# Altium PCB AB1000_FB_V6.1.PcbDoc
Units mm, origin at the board's own origin, x right, y up, seen from the top; angles counter-clockwise.
Board outline 57.5 x 27.6 mm, 2 copper layers (Top Layer, Bottom Layer), stack 1.581 mm thick; 70 components, 68 nets, 304 pads, 85 vias.
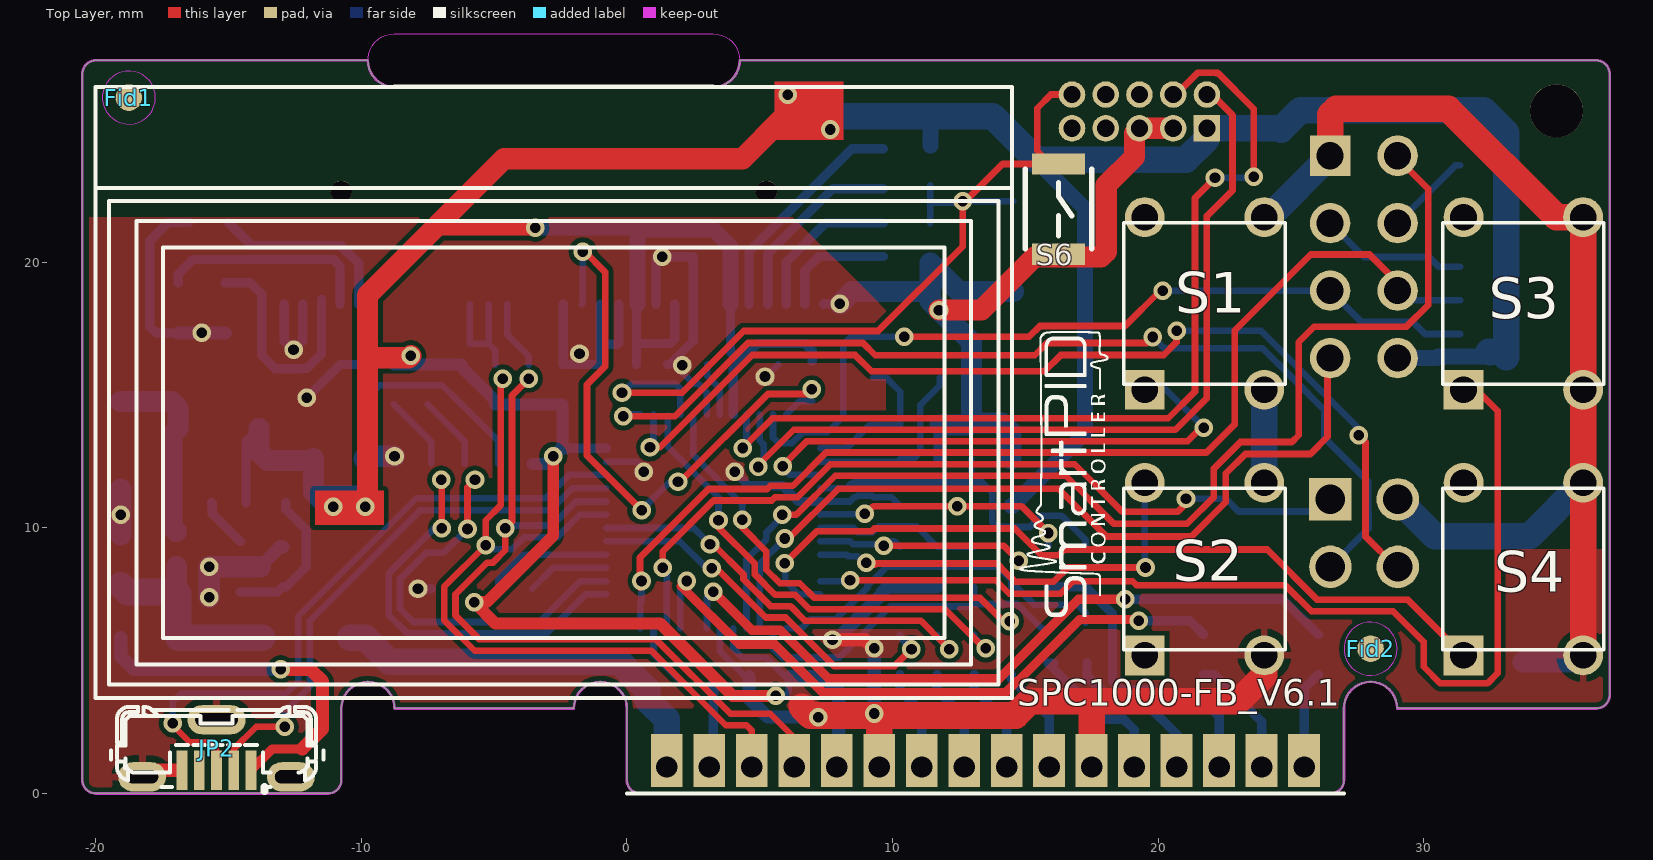
[diagram p0: Top Layer view]
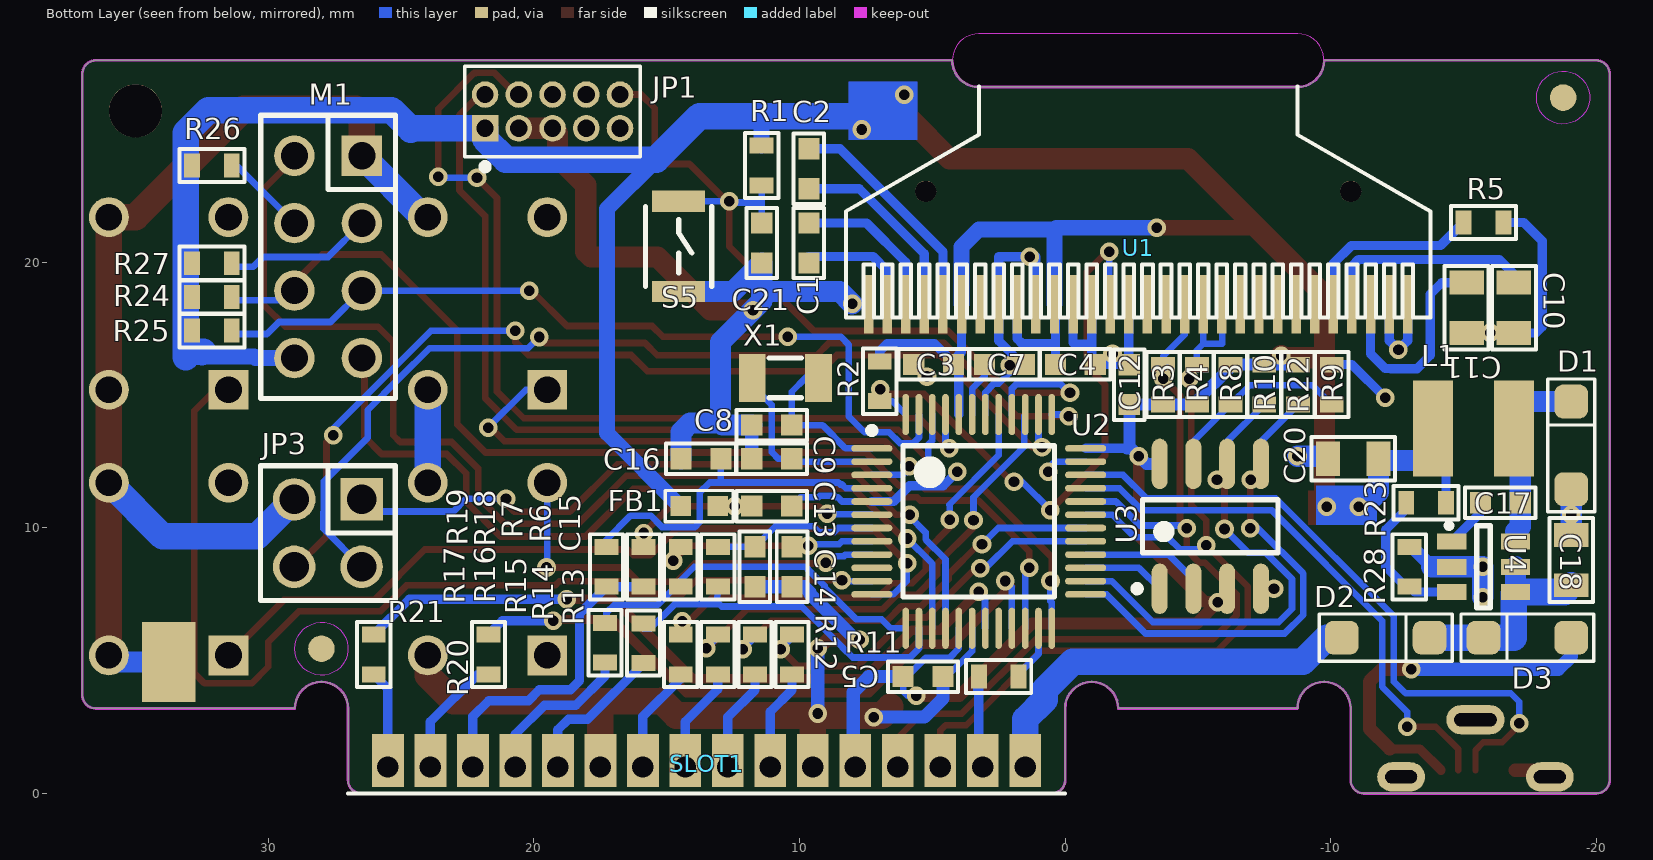
[diagram p1: Bottom Layer view, seen from below]
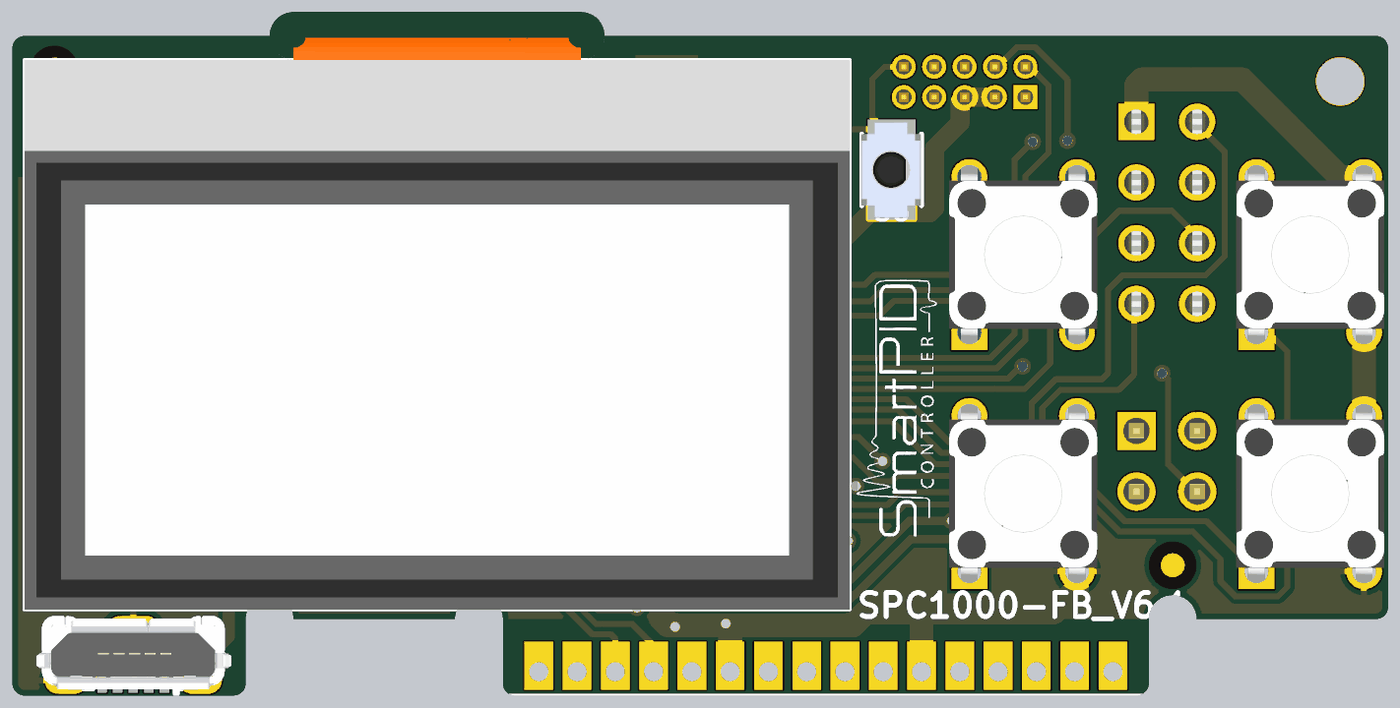
[diagram p2: 3D render of the assembled board from above, using the file's embedded part models]
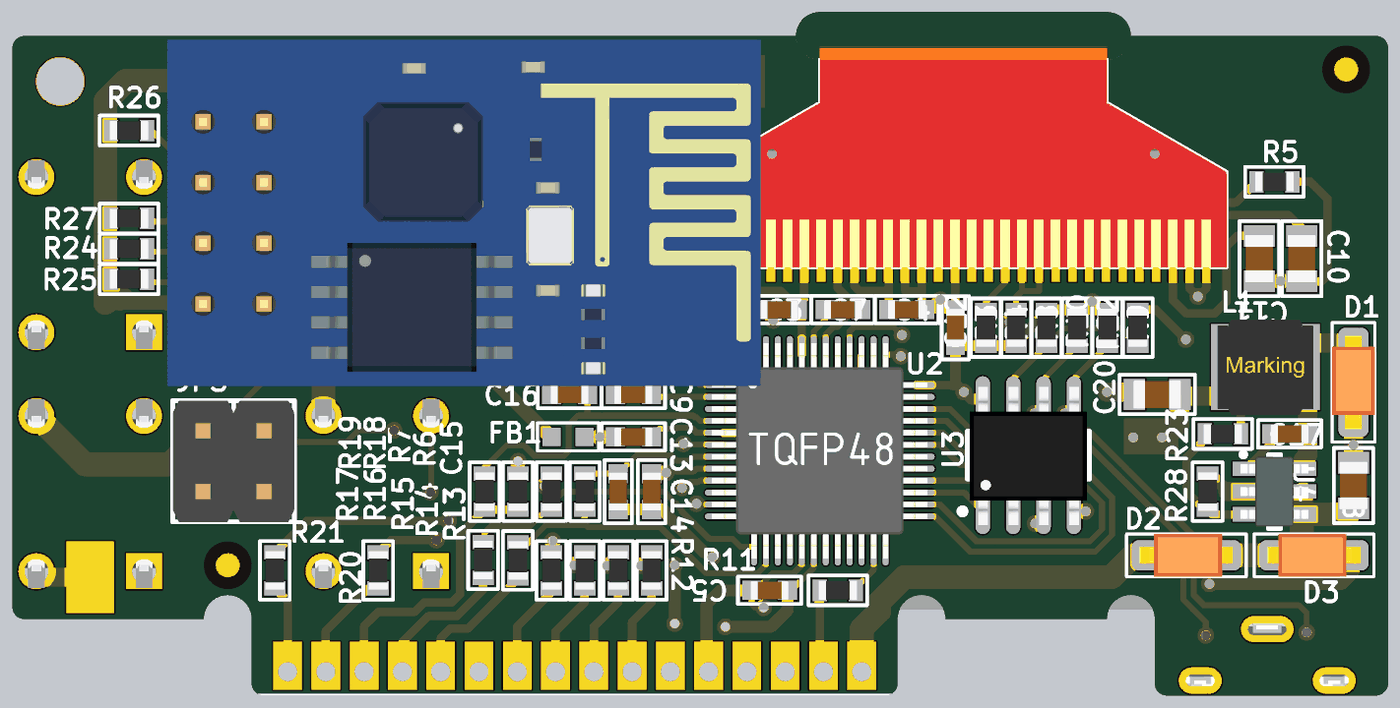
[diagram p3: 3D render of the assembled board from below, using the file's embedded part models]

## Layer stack, top to bottom
Top Solder: solder mask 0.0102, Solder Resist, Dk 3.5
Top Layer: signal copper 0.0356
Dielectric 1: dielectric 1.51, FR-4, Dk 4.8
Bottom Layer: signal copper 0.0356
Bottom Solder: solder mask 0.0102, Solder Resist, Dk 3.5

## Board outline
-20,0.005 -11.25,0.005 ccw(c-11.25,0.505) -10.75,0.505 -10.75,3.205 cw(c-9.75,3.205) -9.75,4.205 cw(c-9.75,3.205) -8.75,3.205 -2,3.205 cw(c-1,3.205) -1,4.205 cw(c-1,3.205) 0,3.205 0,0.505 ccw(c0.5,0.505) 0.5,0.005 26.5,0.005 ccw(c26.5,0.505) 27,0.505 27,3.205 cw(c28,3.205) 28,4.205 cw(c28,3.205) 29,3.205 36.5,3.205 ccw(c36.5,3.705) 37,3.705 37,27.105 ccw(c36.5,27.105) 36.5,27.605 4.25,27.605 cw(c3.25,27.605) 3.25,26.605 -8.75,26.605 cw(c-8.75,27.605) -9.75,27.605 -20,27.605 ccw(c-20,27.105) -20.5,27.105 -20.5,0.505 ccw(c-20,0.505)
cut-out: -8.75,26.609 cw(c-8.75,27.61) -8.75,28.61 3.25,28.61 cw(c3.25,27.61) 4.25,27.61 cw(c3.25,27.61) 3.25,26.609

## Design rules (kind name [scope] priority, off if disabled: settings)
Clearance Clearance_KO [(OnLayer('Keep-Out Layer')) vs InComponent('SLOT1','JP2')] p1: gap=0
Clearance [All] p2: gap=0.18
ComponentClearance ComponentClearance_fiduc [All vs InComponent('Fid1')] p1: gap=-1 collisioncheckmode=3 verticalgap=-1 showdistances=TRUE
ComponentClearance [All] p2: gap=0.254 collisioncheckmode=3 verticalgap=0.254 showdistances=FALSE
HoleToHoleClearance [All] p1: gap=0.18 allowstackedmicrovias=TRUE
MinimumSolderMaskSliver [All] p1: minsoldermaskwidth=0.1
PolygonConnect PolygonConnect_via [All vs IsVia] p1: connectstyle=Direct reliefconductorwidth=0.254 reliefentries=4 polygonreliefangle="90 Angle" airgapwidth=0.254
PolygonConnect [All] p2: connectstyle=Relief reliefconductorwidth=0.254 reliefentries=4 polygonreliefangle="90 Angle" airgapwidth=0.254
RoutingVias [All] p1: holewidth=0.5 width=0.8 viastyle="Through Hole" minholewidth=0.4 minwidth=0.7 maxholewidth=1 maxwidth=2
SolderMaskExpansion [All] p1: expansion=0.07
Width [All] p1: maxlimit=3 minlimit=0.18 preferedwidth=0.35
27 further rules are at their usual default settings.

## Components (designator, comment, footprint, x,y, rotation, side; value= is the part's Value field where it differs from the comment)
C1 "1uF" C0603_IR 9.647,20.731 r270 bottom
C2 "1uF" C0603_IR 9.647,23.525 r270 bottom
C3 "1uF" C0603_IR 4.948,16.159 r180 bottom
C4 "1uF" C0603_IR -0.386,16.159 r0 bottom
C5 "0.1uF" C0603_IR 5.35,4.405 r0 bottom
C7 "0.1uF" C0603_IR 2.281,16.159 r0 bottom
C8 "15pF" C0603_IR 11.044,13.873 r0 bottom
C9 "15pF" C0603_IR 11.044,12.603 r0 bottom
C10 "2.2uF 16V" C0805_IR -16.896,18.288 r90 bottom
C11 "10uF/16V" C0805_IR -15.118,18.288 r90 bottom
C12 "0.1uF" C0603_IR -2.418,15.397 r90 bottom
C13 "0.1uF" C0603_IR 11.044,10.825 r180 bottom
C14 "0.1uF" C0603_IR 10.282,8.539 r270 bottom
C15 "0.1uF" C0603_IR 11.679,8.539 r270 bottom
C16 "0.1uF" C0603_IR 13.711,12.603 r0 bottom
C17 "10nF" C0603_IR -16.388,10.952 r0 bottom
C18 "10uF" C0805_IR -19.055,8.793 r270 bottom
C20 "10uF" C0805_IR -10.85,12.605 r180 bottom
C21 "0.1uF" C0603_IR 11.425,20.731 r90 bottom
D1 "B5819W" SOD123 -19.055,13.111 r90 bottom
D2 "B5819W" SOD123 -12.07,5.872 r180 bottom
D3 "B5819W" SOD123 -17.404,5.872 r0 bottom
FB1 "1KZ" 0603FB-1KZ 13.076,10.825 r0 bottom
Fid1 "Fiducial mark" Fiducial -18.75,26.205 r90 top
Fid2 "Fiducial mark" Fiducial 28,5.455 r90 top
JP1 "Pin Header & Jumper 1.27 mm (62201021121)" 62201021121_m 19.299,25.684 r180 bottom
JP2 "USB Connector Vert" USB_1051330001_slt -15.45,1.705 r180 top
JP3 "WE-2.54 mm Pin Header & Jumper 61300421121" 61300421121 27.756,9.809 r0 bottom
L1 "4.7 µH" "WE-LQS 4012" -15.372,13.746 r0 bottom
M1 "ESP8266-01" ESP8266-01 27.75,20.205 r270 bottom
R1 "10K" R0603_IR 11.425,23.652 r270 bottom
R2 "10K" R0603_IR 6.98,15.524 r270 bottom
R3 "10K" R0603_IR -3.688,15.397 r90 bottom
R4 "10K" R0603_IR -4.958,15.397 r90 bottom
R5 "390K" R0603_IR -15.75,21.505 r180 bottom
R6 "20K" R0603_IR 13.076,8.539 r90 bottom
R7 "20K" R0603_IR 14.473,8.539 r90 bottom
R8 "10K" R0603_IR -6.228,15.397 r90 bottom
R9 "DNP" R0603_IR -10.038,15.397 r270 bottom
R10 "10K" R0603_IR -7.498,15.397 r90 bottom
R11 "1K" R0603_IR 2.5,4.405 r180 bottom
R12 "1K" R0603_IR 10.282,5.237 r90 bottom
R13 "1K" R0603_IR 11.679,5.237 r90 bottom
R14 "1K" R0603_IR 13.076,5.237 r90 bottom
R15 "1K" R0603_IR 14.473,5.237 r90 bottom
R16 "100" R0603_IR 15.87,5.662 r90 bottom
R17 "100" R0603_IR 17.325,5.68 r90 bottom
R18 "10" R0603_IR 15.87,8.539 r90 bottom
R19 "1K" R0603_IR 17.267,8.539 r90 bottom
R20 "1K" R0603_IR 21.712,5.237 r90 bottom
R21 "1K" R0603_IR 26.03,5.237 r90 bottom
R22 "10K" R0603_IR -8.768,15.397 r90 bottom
R23 "49.9k 0.5%" R0603_IR -13.594,10.952 r0 bottom
R24 "10K" R0603_IR 32.126,18.699 r180 bottom
R25 "10K" R0603_IR 32.126,17.429 r180 bottom
R26 "10K" R0603_IR 32.126,23.652 r180 bottom
R27 "10K" R0603_IR 32.126,19.969 r180 bottom
R28 "16k 0.5%" R0603_IR -12.959,8.539 r270 bottom
S1 "430156043726" 4301x60437x6_m 21.75,18.455 r0 top
S2 "430156043726" 4301x60437x6_m 21.75,8.455 r0 top
S3 "430156043726" 4301x60437x6_m 33.75,18.455 r0 top
S4 "430156043726" 4301x60437x6_m 33.75,8.455 r0 top
S5 "B3U-1000P" SW_Tactile_SMD_4x2.5 14.55,20.605 r270 bottom
S6 "B3U-1000P" SW_Tactile_SMD_4x2.5 16.25,22.005 r270 top
SLOT1 "slot_front_panel_main_v3" FRONT_PANEL_MAIN_SLOT_V2.2_NCO 13.5,1 r180 bottom
U1 "OLED 1.3 128x64" OLED_1.3_128x64 -2.75,13.205 r180 top locked
U2 "ATSAMD21G-A" STM-LQFP48_L 3.253,10.249 r180 bottom
U3 "SPI EEPROM" 8S1_L -5.466,10.063 r90 bottom
U4 "AP3211(AOZ1280)" SOT-23-6 -15.753,8.539 r0 bottom
X1 "32.768kHz" FC-135 10.536,15.651 r180 bottom

## Footprints (in the part's own frame and the unit in brackets; to place one, negate y for a bottom-side part, rotate by r counter-clockwise, add the part's x,y. Pads: shape width x height; smd on the part's side, far side on the other; paste and mask are expansions set on the pad)
8S1_L [mm] "SOIC, 8-Leads, Body 4.9x3.9mm, Pitch 1.27mm, IPC High Density"
  oval 1.9x0.6 smd: 1(-2.35,1.905) 2(-2.35,0.635) 3(-2.35,-0.635) 4(-2.35,-1.905) 5(2.35,-1.905) 6(2.35,-0.635) 7(2.35,0.635) 8(2.35,1.905)
  silkscreen extent -2.47,-2.55 1,2.88, body extent -2.92,-2.45 2.86,2.45, height 1.45
0603FB-1KZ [mil] "FERRITE BEAD 0603"
  rect 30x30 smd: 1(0,0) 2(55,0)
  silkscreen extent -23,-23 78,23, body extent -4,-15 59,15, height 20
4301x60437x6_m [mm] "6*6mm vertical type, THT, height 4.3mm, salmon actuator 360gf, Bulk"
  rect 1.5x1.5 hole 1: 1(-2.25,-3.25)
  round 1.5 hole 1: 1(-2.25,3.25) 2(2.25,-3.25) 2(2.25,3.25)
  silkscreen extent -3.04,-3.04 3.04,3.04, body extent -3.1,-3.95 3.1,3.95, height 4.31
61300421121 [mm] "4 pins, dual pin, straight, gold plating"
  rect 1.6x1.6 hole 1.1: 1(-1.27,-1.27)
  round 1.6 hole 1.1: 2(1.27,-1.27) 3(1.27,1.27) 4(-1.27,1.27)
  silkscreen extent -2.54,-2.54 2.54,2.54, body extent -2.54,-2.54 2.54,2.54, height 8.55
62201021121_m [mm] "10 pins, dual row, straight, gold plating"
  rect 1x1 hole 0.65: 1(-2.54,-0.635)
  round 1 hole 0.65: 2(-2.54,0.635) 3(-1.27,-0.635) 4(-1.27,0.635) 5(0,-0.635) 6(0,0.635) 7(1.27,-0.635) 8(1.27,0.635) 9(2.54,-0.635) 10(2.54,0.635)
  silkscreen extent -3.3,-2.21 3.3,1.7, body extent -3.17,-1.7 3.18,1.7, height 5.31
C0603_IR [mm]
  rect 0.8x0.8 smd: 1(0.75,0) 2(-0.75,0)
  silkscreen extent -1.33,-0.58 1.33,0.58, body extent -0.8,-0.4 0.8,0.4, height 0.8
C0805_IR [mm]
  rect 0.9x1.3 smd: 1(0.95,0) 2(-0.95,0)
  silkscreen extent -1.58,-0.82 1.58,0.82, body extent -1,-0.6 1,0.6, height 0.95
ESP8266-01 [mm] "8 pins, dual row, straight, gold plating"
  rect 1.52x1.52 hole 1.02: 1(-3.81,1.27)
  round 1.52 hole 1.02: 2(-3.81,-1.27) 3(-1.27,1.27) 4(-1.27,-1.27) 5(1.27,1.27) 6(1.27,-1.27) 7(3.81,1.27) 8(3.81,-1.27)
  silkscreen extent -5.33,-2.54 5.33,2.54, body extent -7.25,-2.78 7.25,22.02, height 14.38
FC-135 [mm]
  rect 1x1.8 smd: 1(-1.25,0) 2(1.25,0)
  silkscreen extent -0.6,-0.75 0.6,0.75, body extent -1.6,-0.75 1.6,0.75, height 0.81
Fiducial [mm]
  round 1 smd far side paste-10 mask+0.5: 0(0,0)
  round 1 smd paste-10 mask+0.5: 0(0,0)
  Keep-Out Layer circle w0.01: c0,0 r1
FRONT_PANEL_MAIN_SLOT_V2.2_NCO [mm]
  rect 1.2x1.2 hole 0.8 paste-3: 1(-12,0) 2(-10.4,0) 3(-8.8,0) 4(-7.2,0) 5(-5.6,0) 6(-4,0) 7(-2.4,0) 8(-0.8,0) 9(0.8,0) 10(2.4,0) 11(4,0) 12(5.6,0) 13(7.2,0) 14(8.8,0) 15(10.4,0) 16(12,0)
  rect 1.2x2 smd paste-3: 1(-12,0.25) 2(-10.4,0.25) 3(-8.8,0.25) 4(-7.2,0.25) 5(-5.6,0.25) 6(-4,0.25) 7(-2.4,0.25) 8(-0.8,0.25) 9(0.8,0.25) 10(2.4,0.25) 11(4,0.25) 12(5.6,0.25) 13(7.2,0.25) 14(8.8,0.25) 15(10.4,0.25) 16(12,0.25)
  rect 1.2x2 smd far side paste-3: 1(-12,0.25) 2(-10.4,0.25) 3(-8.8,0.25) 4(-7.2,0.25) 5(-5.6,0.25) 6(-4,0.25) 7(-2.4,0.25) 8(-0.8,0.25) 9(0.8,0.25) 10(2.4,0.25) 11(4,0.25) 12(5.6,0.25) 13(7.2,0.25) 14(8.8,0.25) 15(10.4,0.25) 16(12,0.25)
  silkscreen extent -13.5,-1 13.5,-1, body extent -12.6,-0.75 12.6,1.25, height 0.02
OLED_1.3_128x64 [mm]
  rect 0.356x2.2 smd far side paste-0.5: 1(-10.15,-5.219) 2(-9.45,-5.219) 3(-8.75,-5.219) 4(-8.05,-5.219) 5(-7.35,-5.219) 6(-6.65,-5.219) 7(-5.95,-5.219) 8(-5.25,-5.219) 9(-4.55,-5.219) 10(-3.85,-5.219) 11(-3.15,-5.219) 12(-2.45,-5.219) 13(-1.75,-5.219) 14(-1.05,-5.219) 15(-0.35,-5.219) 16(0.35,-5.219) 17(1.05,-5.219) 18(1.75,-5.219) 19(2.45,-5.219) 20(3.15,-5.219) 21(3.85,-5.219) 22(4.55,-5.219) 23(5.25,-5.219) 24(5.95,-5.219) 25(6.65,-5.219) 26(7.35,-5.219) 27(8.05,-5.219) 28(8.75,-5.219) 29(9.45,-5.219) 30(10.15,-5.219)
  round 0.8 hole 0.8: CT(-8,-9.469) CT(8,-9.469)
  silkscreen extent -17.25,-13.41 17.25,9.6, body extent -17.25,-14.5 17.25,9.6, height 1.45
R0603_IR [mm]
  rect 0.6x0.9 smd: 1(0.75,0) 2(-0.75,0)
  silkscreen extent -1.22,-0.63 1.22,0.63, body extent -0.8,-0.4 0.8,0.4, height 0.4
SOD123 [mil]
  rrect50% 50x50 smd: A(-65,0) C(65,0)
  silkscreen extent -98,-35 98,35, body extent -77,-35 77,35, height 47
SOT-23-6 [mm] "SOT-23, 6-Leads, Body 2.90x1.60mm, Pitch 0.95mm, IPC Medium Density"
  rect 1.1x0.6 smd: 1(1.2,-0.95) 2(1.2,0) 3(1.2,0.95) 4(-1.2,0.95) 5(-1.2,0) 6(-1.2,-0.95)
  silkscreen extent -0.25,-1.65 1.4,1.55, body extent -1.42,-1.46 1.42,1.46, height 1.1
STM-LQFP48_L [mm] "QFP, 48-Leads, Body 7x7mm, Pitch 0.5mm, IPC High Density"
  oval 1.55x0.25 smd: 1(-4.025,2.75) 2(-4.025,2.25) 3(-4.025,1.75) 4(-4.025,1.25) 5(-4.025,0.75) 6(-4.025,0.25) 7(-4.025,-0.25) 8(-4.025,-0.75) 9(-4.025,-1.25) 10(-4.025,-1.75) 11(-4.025,-2.25) 12(-4.025,-2.75) 25(4.025,-2.75) 26(4.025,-2.25) 27(4.025,-1.75) 28(4.025,-1.25) 29(4.025,-0.75) 30(4.025,-0.25) 31(4.025,0.25) 32(4.025,0.75) 33(4.025,1.25) 34(4.025,1.75) 35(4.025,2.25) 36(4.025,2.75)
  oval 0.25x1.55 smd: 13(-2.75,-4.025) 14(-2.25,-4.025) 15(-1.75,-4.025) 16(-1.25,-4.025) 17(-0.75,-4.025) 18(-0.25,-4.025) 19(0.25,-4.025) 20(0.75,-4.025) 21(1.25,-4.025) 22(1.75,-4.025) 23(2.25,-4.025) 24(2.75,-4.025) 37(2.75,4.025) 38(2.25,4.025) 39(1.75,4.025) 40(1.25,4.025) 41(0.75,4.025) 42(0.25,4.025) 43(-0.25,4.025) 44(-0.75,4.025) 45(-1.25,4.025) 46(-1.75,4.025) 47(-2.25,4.025) 48(-2.75,4.025)
  silkscreen extent -4.15,-2.85 2.85,3.55, body extent -4.51,-4.51 4.51,4.51, height 1.1
SW_Tactile_SMD_4x2.5 [mm] "B3U-1000P"
  rect 0.8x2 smd: 1(-1.7,0) 2(1.7,0)
  silkscreen extent -1.5,-1.25 1.5,1.25, body extent -2,-1.27 2,1.23, height 1.6
USB_1051330001_slt [mm]
  rect 0.4x1.5 smd: 1(-1.3,0.825) 2(-0.65,0.825) 3(0,0.825) 4(0.65,0.825) 5(1.3,0.825)
  oval 1.8x1.1 hole 0.5 slot 1.2 at 0 deg: M1(-2.8,1.075) M2(2.8,1.075)
  oval 2.2x1.1 hole 0.5 slot 1.6 at 0 deg: M3(0,-1.075)
  silkscreen extent -4.03,-1.56 3.98,1.6, body extent -4.02,-1.56 3.98,1.46, height 6.61
"WE-LQS 4012" [mm] "SMD Power Inductor, 2-Leads, Body 4.0x4.0mm"
  rect 1.5x3.6 smd: 1(-1.525,0) 2(1.525,0)
  body extent -2,-2 2,2, height 1.17

## Part data
C1 C2 C3 C4 C5 C7 C8 C9 C10 C11 C12 C13 C14 C15 C16 C21: library part C_SMD, "Capacitor"
C17 C18 C20: library part CapSMD, "Capacitor"
D1 D2 D3: library part "Diode SCHOTTKY", "DIODE SCHOTTKY"
FB1: library part 0603FB-1KZ, "FERRITE BEAD 1000 OHM 400mA"
Fid1 Fid2: library part Fiducial, "Fiducial Mark"
JP1: "WR-PHD 1.27 mm Dual Pin Header"
JP2: "Micro USB SMT Type B"
JP3: "WR-PHD 2.54 mm Dual Pin Header"
L1: library part "WE-LQS 4012, 74404041010", "WE-LQS SMD Power Inductor, L=1.0 µH"
R1 R2 R3 R4 R5 R6 R7 R8 R9 R10 R11 R12 R13 R14 R15 R16 R17 R18 R19 R20 R21 R22: library part R_SMD, "Resistor"
R23 R24 R25 R26 R27 R28: library part ResSMD, "Resistor"
S1 S2 S3 S4 S5 S6: library part "WS-TATV, 430156043726m", "WS-TATV 6x6 mm THT"
SLOT1: library part slot_front_panel_main_v2_1
U1: library part DISP_OLED_1.3_128x64, "UG-2864HSWEG01 OLED display / <p>Both 1.3\" and 0.96\" models share the same FPC tab footprint, only the screen dimensions vary.</p>"
U2: "Atmel SAMD21G SMART ARM-Based Microcontroller"
U3: library part "25x SPI EEPROM", "8Kbit (1024 x 8), SPI Bus Serial Automotive EEPROM, supports Mode 0 and 3 operation, 2.7V, 8-Pin SOIC"
U4: library part LT1933ES6, "600 mA, 500 kHz Step-Down Switching Regulator, 6-pin SOT23 (S6-6), -40 to 85 degC"
X1: library part XTAL_FC-135, "EPSON TOYOCOM - FC-135 32.768KHZ ±20PPM,9.0PF - CRYSTAL, SM, WATCH"

## Free pads (board coordinates)
  rect 2x3 smd far side paste-3: SM(33.75,4.955)
  round 2 hole 2: T(35,25.705)

## Via types
v1: diameter 0.7, hole 0.4, Top Layer to Bottom Layer, tented both sides, 85 vias

## Nets (pads, with @x,y where several pads share a name; then routed paths per layer and width w, separated by ;. In a path a pad name is that pad's centre, name@x,y a point inside that pad or via, vN(x,y) a via of type N, cw(c..) or ccw(c..) an arc to the next point about the centre after c; other vN are vias at no path point)
12V: D2.A SLOT1.16 | length 15
  Bottom Layer w1: D2.A -9.854,5.872 -8.94,4.958 -0.284,4.958 0.77,3.903 0.77,3.53 1.5,2.8 SLOT1.16@1.5,1.25
A33V: C13.2 FB1.1 R18.1 U2.6 | length 9.7
  Top Layer w0.25: v1@8.979,10.513 9.291,10.825 14.854,10.825 v1(15.87,9.809)
  Bottom Layer w0.25: U2.6 7.278,10.513 v1@8.979,10.513 ; R18.1 v1(15.87,9.809)
  other v1: 8.954,10.538 12.441,10.825
ADD1: U2.20
BTN1: S1.1 U2.3 | length 21.4
  Top Layer w0.25: v1(5.862,12.324) 5.862,12.121 6.064,12.324 6.064,12.551 6.783,13.27 21.115,13.27 21.625,13.78 v1(21.725,13.78)
  Bottom Layer w0.25: v1(5.862,12.324) 5.862,12.16 5.873,12.171 5.952,12.092 6.036,12.092 6.13,11.999 U2.3 ; S1.1@19.5,15.205 20.3,15.205 v1(21.725,13.78)
BTN2: S2.1 U2.9 | length 16.4
  Top Layer w0.25: v1(9.012,8.691) 8.947,8.626 9.34,8.626 9.378,8.664 13.941,8.664 14.097,8.508 14.097,8.496 14.613,7.98 16.073,7.98 16.607,8.514 v1(19.528,8.514)
  Bottom Layer w0.25: U2.9 8.266,8.999 8.327,8.938 8.689,8.938 8.936,8.691 v1(9.012,8.691) ; S2.1@19.5,11.705 19.5,8.567 19.447,8.514 v1(19.528,8.514)
BTN3: S3.1 U2.11 | length 39.7
  Top Layer w0.25: v1(8.402,8.031) 13.889,8.031 14.397,7.523 16.327,7.523 16.799,7.995 19.045,7.995 19.201,7.839 24.8,7.839 25.776,6.863 28.842,6.863 30,5.705 30,4.774 30.624,4.15 32.4,4.15 32.786,4.536 32.786,14.406 31.988,15.205 S3.1@31.5,15.205
  Bottom Layer w0.25: U2.11 v1@8.402,7.999
BTN4: S4.1 U2.12 | length 30.5
  Top Layer w0.25: v1(5.939,8.666) 7.156,9.883 9.225,9.883 9.323,9.981 14.605,9.981 15.616,8.971 16.251,8.971 16.469,9.189 24.11,9.189 26.005,7.294 29.411,7.294 S4.1@31.5,5.205
  Bottom Layer w0.25: v1(5.939,8.666) 5.964,8.641 5.964,8.006 6.471,7.499 U2.12
BUZ: R11.1 U2.23 | length 2.3
  Bottom Layer w0.25: U2.23 1.003,5.257 R11.1@1.912,4.348
D33V: C3.1 C4.1 C5.1 C12.2 C20.1 FB1.2 JP1.1 L1.2 M1.8 R1.2 R2.2 R3.2 R4.2 R8.1 R10.1 R22.1 R23.2 R24.2 R25.2 R26.2 R27.2 SLOT1.12 U1.6 U1.9 U1.11 U2.17 U2.36 U2.44 U3.3 U3.8 | length 164.9
  Top Layer w0.45: v1(-8.133,16.489) v1@-8.006,16.616 ; v1(-2.772,12.706) -2.772,9.712 -5.279,7.205 v1(-5.75,7.205) -4.95,6.405 1.25,6.405 3.975,3.68 v1(5.6,3.68)
  Top Layer w0.6: -7.229,21.305 v1(-3.45,21.305)
  Top Layer w0.8: v1(-9.85,10.805) -9.768,10.887 -9.768,16.405 ; v1(-8.133,16.489) -8.217,16.405 -9.768,16.405 ; 5.85,25.405 4.35,23.905 -4.629,23.905 -7.229,21.305 -9.768,18.765 -9.768,16.405
  Bottom Layer w0.25: U2.17 4.003,5.465 4.358,5.11 5.25,5.11 6.012,4.348 C5.1@6.079,4.348 ; v1(5.6,3.68) 5.925,3.68 6.1,3.855 C5.1
  Bottom Layer w0.35: R23.2 -14.344,13.249 L1.2 ; R8.1@-6.228,16.057 R8.1 ; R4.2 R4.2@-4.958,14.787 ; -2.331,12.999 U2.36 ; C4.1 0.364,16.946 ; U1.11 0.364,18.388 0.364,16.946 ; U1.9 1.8,17.126 1.621,16.946 0.364,16.946 ; U1.6 3.9,16.623 4.198,16.325 C3.1@4.198,16.224 ; U2.44 4.003,15.964 C3.1 C3.1@4.198,16.224 ; R2.2 6.98,16.667 6.698,16.949 4.923,16.949 C3.1@4.198,16.224
  Bottom Layer w0.45: R22.1 R10.1 R8.1 ; R8.1@-6.228,16.057 R4.2@-4.958,14.787 ; R4.2 R3.2 C12.2 -2.418,13.086 -2.331,12.999 -2.48,12.999 v1(-2.772,12.706) -3.065,12.413 U3.8
  Bottom Layer w0.5: C5.1 7.4,4.405 7.98,3.825 7.98,1.25 SLOT1.12@7.9,1.25
  Bottom Layer w0.6: v1(-3.45,21.305) 0.334,21.305 0.4,21.239 ; U1.11 0.4,21.239 ; U1.6 3.9,20.585 3.246,21.239 0.4,21.239 ; R1.2 11.425,25.481 11.45,25.506 ; FB1.2 14.498,10.825 17.25,13.577 17.25,22.018 15.399,23.869 ; M1.8 30.483,16.395 30.543,16.455 32.457,16.455 32.504,16.409 32.73,16.635
  Bottom Layer w0.8: L1.2 -13.847,12.856 -13.533,12.542 C20.1@-11.816,12.542 ; C20.1 -11.8,11.355 -11.25,10.805 v1(-11.05,10.805) v1@-10.15,10.805
  Bottom Layer w1: 7.05,25.506 11.45,25.506 13.762,25.506 15.399,23.869 21.058,23.869 21.839,24.65 JP1.1 24.582,25.049 24.633,24.998 25.37,25.735 32.253,25.735 33.117,24.871 33.117,16.438 32.92,16.635 32.73,16.635 32.457,16.635
  other v1: 7.65,25.005 6.05,26.305
EE_MISO: U2.28 U3.2 | length 4.8
  Bottom Layer w0.25: U3.2 -4.831,8.056 -3.889,8.999 U2.28
EE_MOSI: R22.2 U2.25 U3.5 | length 18
  Top Layer w0.25: v1(-6.99,11.816) -6.965,11.79 v1(-6.965,9.987)
  Bottom Layer w0.25: R22.2 -7.371,13.25 U3.5 ; v1(-6.965,9.987) -7.267,9.987 -8.971,8.283 -8.971,6.735 -8.264,6.028 -3.027,6.028 -1.556,7.499 U2.25
EE_SCK: R10.2 U2.26 U3.6 | length 18
  Top Layer w0.25: v1(-5.999,9.961) -5.999,11.536 v1(-5.72,11.816)
  Bottom Layer w0.25: R10.2 -6.101,13.25 U3.6 ; v1@-5.872,9.961 v1(-5.999,9.961) -6.888,9.072 -7.545,9.072 -8.541,8.077 -8.541,6.958 -8.04,6.458 -3.297,6.458 -1.756,7.999 U2.26
EE_SS: U2.27 U3.1 | length 3.1
  Bottom Layer w0.25: U3.1 -2.775,8.499 U2.27
ESP_PRG: M1.5 R25.1 U2.47 | length 31.5
  Top Layer w0.25: v1(10.45,17.205) 15.15,17.205 15.55,17.605 18.75,17.605 20.08,18.935 v1(20.18,18.935)
  Bottom Layer w0.25: U2.47 5.503,13.405 5.714,13.194 6.215,13.194 6.626,13.605 7.55,13.605 8.15,14.205 8.15,16.905 8.45,17.205 v1(10.45,17.205) ; v1(20.18,18.935) M1.5 27.66,17.755 29.6,17.755 30.053,17.302 R25.1@31.376,17.302
ESP_RST: M1.6 R24.1 U2.24 | length 41.7
  Top Layer w0.25: v1(0.55,8.005) 0.55,7.805 0.495,7.75 0.495,8.887 3.074,11.465 5.276,11.465 5.401,11.59 6.251,11.59 7.501,12.84 21.822,12.84 22.88,13.898 22.88,17.425 25.751,20.296 27.964,20.296 28.92,19.34 M1.6@28.92,18.935
  Bottom Layer w0.25: U2.24 0.503,7.195 0.55,7.242 v1(0.55,8.005) ; M1.6 29.383,18.572 R24.1@31.376,18.572
ESP_RX: M1.2 U2.16 | length 42.7
  Top Layer w0.25: v1(5.85,10.505) 6.382,10.505 7.847,11.97 16.521,11.97 18.327,10.165 21.101,10.165 22.1,11.164 22.1,12.238 23.1,13.238 25.039,13.238 25.293,13.492 25.293,16.997 25.878,17.581 29.357,17.581 30.17,18.394 30.17,22.765 M1.2@28.92,24.015
  Bottom Layer w0.25: U2.16 4.503,8.821 5.254,9.572 5.254,9.835 5.85,10.431 v1(5.85,10.505)
ESP_TX: M1.7 U2.15 | length 30.9
  Top Layer w0.25: v1(5.95,9.605) 6.012,9.605 6.051,9.566 7.965,11.48 16.256,11.48 18.054,9.682 21.255,9.682 22.55,10.977 22.55,12.051 23.287,12.788 25.732,12.788 26.38,13.436 M1.7@26.38,16.395
  Bottom Layer w0.25: U2.15 5.003,8.658 v1(5.95,9.605)
FET1: R14.1 U2.39 | length 17.9
  Top Layer w0.25: v1(3.449,10.292) 3.449,10.023 4.82,8.652 4.82,8.25 5.582,7.488 6.332,7.488 6.883,6.937 11.986,6.937 v1@13.482,5.44
  Bottom Layer w0.25: U2.39@1.544,14.232 1.544,13.06 3.449,11.155 v1(3.449,10.292) ; R14.1 13.076,5.897 v1(13.508,5.466)
FET2: R15.1 U2.41 | length 16.7
  Top Layer w0.25: v1(4.35,10.305) 4.35,10.013 5.25,9.113 5.25,8.428 5.76,7.918 6.51,7.918 7.061,7.367 13.293,7.367 v1@14.145,6.516
  Bottom Layer w0.25: U2.41 2.503,12.737 4.364,10.876 4.35,10.862 v1(4.35,10.305)
  other v1: 14.422,6.482
GND: C3.2 C4.2 C5.2 C7.2 C8.1 C9.1 C10.2 C11.2 C12.1 C13.1 C14.1 C15.1 C16.1 C18.2 C20.2 C21.2 D1.A JP1.3 JP1.5 JP2.5 JP2.M1 JP2.M2 JP2.M3 JP3.2 M1.1 pad.SM R5.1 R9.2 R28.2 S1.2 S2.2 S3.2 S4.2 S5.2 S6.2 SLOT1.6 SLOT1.11 U1.1 U1.8 U1.10 U1.12 U1.13 U1.15 U1.29 U1.30 U2.5 U2.18 U2.35 U2.42 U3.4 U4.2 | length 168.5
  Top Layer w0.5: JP2.M2 -18,0.88 JP2.5@-16.947,0.88 ; v1(7.742,5.796) 8.961,5.796 v1@9.304,5.453
  Top Layer w0.8: v1(11.75,18.205) 13.35,18.205 15.35,20.205 17.85,20.205 18.05,20.405 18.05,22.91 19.109,23.969 19.109,24.859 JP1.5 JP1.3
  Top Layer w1: 6.577,3.263 6.9,2.94 14.637,2.94 15.184,3.487 15.195,3.476 23.021,3.476 24,4.455 S2.2@24,5.205 ; SLOT1.11@9.5,1 9.5,1.25 v1@9.5,2.757 ; SLOT1.6@17.5,1 17.5,1.25 17.5,3.376 ; M1.1 26.48,25.55 26.716,25.786 30.919,25.786 35,21.705 36,21.705 36,15.205 36,11.705 S4.2@36,5.205
  Bottom Layer w0.25: U2.35 0.379,12.499 0.63,12.247 v1(0.63,12.12) ; C7.2 1.771,16.159 2.496,15.434 2.674,15.434 3.003,15.105 U2.42 ; U2.18 3.503,5.357 4.455,4.405 C5.2 ; v1(5.202,15.702) 5.241,15.702 C3.2 ; U2.5 8.398,10.999 8.562,11.162 8.623,11.162 8.674,11.213 9.234,11.213 9.285,11.162 9.957,11.162 C13.1
  Bottom Layer w0.35: C10.2 -17.724,17.338 -17.963,17.577 -17.963,20.805 -17.263,21.505 R5.1 ; U1.30 -12.9,17.055 v1(-12.55,16.705) -12.2,17.055 U1.29 ; v1(-12.05,14.905) -10.796,16.159 -10.05,16.159 R9.2 ; v1(-7.866,7.713) U3.4 ; U1.15 -2.4,16.165 -2.394,16.159 C4.2 -1,16.295 -1,16.951 ; U1.13 -1,16.951 ; U1.12 -0.3,16.987 -0.366,16.921 -0.97,16.921 -1,16.951 ; U1.10 1.1,20.21 2.497,20.21 2.5,20.207 U1.8 2.5,17.048 1.611,16.159 C7.2 ; v1(4.059,12.12) 4.586,11.593 5.856,11.593 6.148,11.301 6.148,11.3 6.449,10.999 U2.5 ; U1.1 7.421,18.445 v1(8.021,18.445)
  Bottom Layer w0.5: C10.2 C11.2 ; -13.808,8.539 -13.058,9.289 R28.2 ; C5.2 4.6,3.577 5.297,2.88 v1(7.2,2.88) ; 8.085,6.003 9.612,7.53 9.612,7.581 9.821,7.789 C14.1 C15.1 ; v1(9.317,3.017) v1(9.317,5.466) ; C9.1 C8.1
  Bottom Layer w0.8: C18.2 D1.A ; v1(-15.728,7.396) v1(-15.728,8.539) U4.2 -13.808,8.539 ; C20.2 -9.8,12.705 v1(-8.75,12.705) ; v1(8.021,18.445) 8.481,18.905 11.425,18.905 ; C8.1 12.898,13.873 12.974,13.949 ; C16.1 14.461,13.606 14.117,13.949 12.974,13.949 ; S5.2 12.501,18.905 C21.2 11.425,18.905 ; pad.SM S4.2@35.75,4.955 ; 11.425,18.905 11.425,18.547 12.974,16.997 12.974,13.949
  Bottom Layer w1: S2.2@24,11.705 S1.2@24,15.205 ; S1.2@24,21.705 24.17,21.705 M1.1 ; JP3.2 30.423,9.682 33.977,9.682 S4.2@36,11.705
  other v1: -19.055,10.495 2.078,16.134 -1.783,16.565 -16.007,17.348 1.329,20.21
GROVE_SCK: R3.1 SLOT1.13 U1.18 U2.32 | length 32.8
  Top Layer w0.25: v1(-3.688,15.626) -4.323,14.991 -4.323,10.241 v1(-4.577,9.987) -4.577,9.162 -5.042,8.697 -5.258,8.697 -6.45,7.505 -6.45,6.705 -5.55,5.805 1.1,5.805 3.9,3.005 5.395,3.005 6.3,2.1 6.3,1.25 SLOT1.13@6.3,1
  Bottom Layer w0.25: v1(-4.577,9.987) -4.468,10.096 -2.814,10.096 -1.911,10.999 U2.32 ; U1.18 -4.5,17.276 -3.688,16.464 R3.1
GROVE_SDA: R4.1 SLOT1.14 U1.19 U1.20 U2.31 | length 34.5
  Top Layer w0.25: v1@-4.729,15.626 -4.753,15.602 -4.753,10.852 -5.314,10.292 v1(-5.314,9.352) -6.88,7.785 -6.88,6.527 -5.728,5.375 0.922,5.375 3.722,2.575 4.5,2.575 4.7,2.375 4.7,1.25 SLOT1.14@4.7,1
  Bottom Layer w0.25: U1.20 -5.911,18.413 -5.911,16.934 -5.2,16.934 ; v1(-5.314,9.352) -5.314,9.199 -4.324,9.199 -3.878,9.646 -2.628,9.646 -1.775,10.499 U2.31 ; U1.19 -5.2,16.934 ; R4.1 -4.958,16.692 -5.2,16.934
  other v1: -4.679,15.626
M_RESET: C21.1 JP1.10 R1.1 S5.1 S6.1 U2.40 | length 32.5
  Top Layer w0.25: v1(-0.183,15.092) 2.081,15.092 4.403,17.415 9.46,17.415 12.65,20.605 12.65,22.21 v1@12.745,22.305 ; v1(12.65,22.305) v1@12.745,22.305 ; JP1.10 15.964,26.319 15.45,25.805 15.45,24.205 15.95,23.705 14.145,23.705 v1@12.745,22.305
  Bottom Layer w0.25: v1@-0.157,15.067 v1(-0.183,15.092) -0.157,15.092 0.173,15.422 1.835,15.422 2.003,15.255 U2.40 ; C21.1 11.425,22.255 ; R1.1 11.425,22.255 ; S5.1 12.7,22.305 12.65,22.255 11.425,22.255
NetC1_1: C1.1 U1.2 | length 4.4
  Bottom Layer w0.35: U1.2 6.7,19.689 7.234,20.223 C1.1@9.647,20.223
NetC1_2: C1.2 U1.3 | length 5.8
  Bottom Layer w0.35: U1.3 6,20.005 7.476,21.481 C1.2
NetC2_1: C2.1 U1.4 | length 7.3
  Bottom Layer w0.35: U1.4 5.3,20.321 7.754,22.775 C2.1
NetC2_2: C2.2 U1.5 | length 8.6
  Bottom Layer w0.35: U1.5 4.6,20.399 8.476,24.275 C2.2
NetC8_2: C8.2 U2.1 X1.2 | length 5.9
  Bottom Layer w0.25: U2.1 8.265,12.999 9.139,13.873 C8.2 10.294,15.131 9.774,15.651 X1.2
NetC9_2: C9.2 U2.2 X1.1 | length 7
  Bottom Layer w0.25: U2.2 10.19,12.499 C9.2 10.79,12.603 11.044,12.857 11.044,14.635 11.786,15.377 X1.1
NetC10_1: C10.1 U1.27 | length 8.2
  Bottom Layer w0.35: C10.1 -16.896,19.559 -16.35,20.105 -11.05,20.105 -10.8,19.855 U1.27
NetC11_1: C11.1 U1.28 | length 8.6
  Bottom Layer w0.35: C11.1 -14.183,19.238 -13.75,18.805 -13.75,16.505 -13.245,16 -12.258,16 -12.253,16.005 -12.05,16.005 -11.5,16.555 U1.28 U1.28@-11.5,18.605
NetC17_1: C17.1 U4.1 | length 1.9
  Bottom Layer w0.35: C17.1 -15.61,10.924 -15.61,10.546 U4.1
NetC17_2: C17.2 D1.C L1.1 U4.6 | length 7.1
  Bottom Layer w0.8: D1.C -17.15,14.762 -16.897,14.509 L1.1 -17.138,13.505 C17.2 -17.138,10.051 -16.953,9.866
NetC18_1: C18.1 D2.C D3.C U4.4 U4.5 | length 8.1
  Bottom Layer w0.8: U4.4 U4.5
  Bottom Layer w1: C18.1 -18.801,7.589 U4.4 -16.896,7.532 -16.896,5.872 D3.C D2.C
NetM1_3: M1.3 R27.1 | length 5.6
  Bottom Layer w0.25: M1.3 27.75,20.205 30.2,20.205 30.563,19.842 R27.1@31.376,19.842
NetM1_4: M1.4 R26.1 | length 3.3
  Bottom Layer w0.25: M1.4 31.197,23.652 R26.1
NetR5_2: R5.2 U1.26 | length 7.1
  Bottom Layer w0.35: R5.2 -14.13,20.635 -10.78,20.635 -10.1,19.955 U1.26
NetR8_2: R8.2 R9.1 U3.7 | length 7.2
  Bottom Layer w0.25: R9.1 -9.313,15.372 -6.953,15.372 R8.2 -6.215,14.647 -4.831,13.263 U3.7
NetR11_2: R11.2 SLOT1.15 | length 3.8
  Bottom Layer w0.35: SLOT1.15@3.1,1.25 3.25,1.4 R11.2 ; 3.3,3.83 R11.2@3.3,4.405
NetR12_2: R12.2 SLOT1.10 | length 3.6
  Bottom Layer w0.35: R12.2 10.282,3.898 11.1,3.08 SLOT1.10@11.1,1.25
NetR13_2: R13.2 SLOT1.9 | length 3.7
  Bottom Layer w0.35: R13.2 11.679,3.901 12.7,2.88 SLOT1.9@12.7,1.25
NetR14_2: R14.2 SLOT1.8 | length 3.7
  Bottom Layer w0.35: R14.2 13.076,3.924 14.3,2.7 SLOT1.8@14.3,1.25
NetR15_2: R15.2 SLOT1.7 | length 3.8
  Bottom Layer w0.35: R15.2 14.473,4.327 15.9,2.9 SLOT1.7@15.9,1.25
NetR16_2: R16.2 SLOT1.5 | length 5.6
  Bottom Layer w0.35: R16.2@16.068,4.912 R16.2 17.982,2.8 18.7,2.8 19.1,2.4 SLOT1.5@19.1,1.25
NetR17_2: R17.2 SLOT1.4 | length 5.8
  Bottom Layer w0.35: R17.2 17.325,4.429 18.424,3.33 19.6,3.33 20.7,2.23 SLOT1.4@20.7,1.25
NetR18_2: R18.2 R19.2 SLOT1.3 | length 11.6
  Bottom Layer w0.35: R18.2 R19.2 18.283,6.773 18.283,4.247 18.625,3.905 19.8,3.905 20.205,3.5 21.7,3.5 22.3,2.9 SLOT1.3@22.3,1.25
NetR20_2: R20.2 SLOT1.2 | length 4.4
  Bottom Layer w0.35: R20.2 22.118,4.487 23.9,2.705 SLOT1.2@23.9,1.25
NetR21_2: R21.2 SLOT1.1 | length 3.5
  Bottom Layer w0.35: SLOT1.1@25.5,1.25 25.5,3.957 R21.2
NetR23_1: R23.1 R28.1 U4.3 | length 5.6
  Bottom Layer w0.35: U4.3 -13.159,7.589 R28.1 -12.82,7.789 -12.07,8.539 -12.07,9.936 -12.844,10.71 R23.1
NTC1: C15.2 R6.1 U2.7 | length 6.3
  Bottom Layer w0.25: U2.7 8.539,9.999 8.7,9.838 9.258,9.838 9.483,10.063 10.905,10.063 C15.2 ; C15.2 R6.1
NTC2: C14.2 R7.1 U2.8 | length 8.5
  Top Layer w0.25: v1(9.672,9.326) 14.194,9.326 v1(14.752,8.768)
  Bottom Layer w0.25: U2.8 8.403,9.499 8.513,9.388 8.58,9.388 9.139,9.388 9.445,9.388 9.556,9.499 10.072,9.499 C14.2
OLED_RES: R2.1 U1.14 U2.48 | length 22.7
  Top Layer w0.25: v1(-1.656,20.401) -1.58,20.401 -0.818,19.639 -0.818,16.083 -1.504,15.397 -1.504,12.73 v1(0.554,10.673) ; v1(1.925,11.739) 2.002,11.739 5.309,15.047 6.782,15.047 v1(6.955,15.219)
  Bottom Layer w0.25: U1.14 -1.656,18.468 v1(-1.656,20.401) ; v1(0.554,10.673) 1.621,11.739 v1(1.925,11.739) ; U2.48 6.503,14.774 R2.1
PA13: JP3.1 U2.22 | length 30.8
  Top Layer w0.25: v1(1.35,8.505) 1.35,9.119 3.267,11.035 5.454,11.035 5.579,11.16 6.429,11.16 7.669,12.4 16.861,12.4 18.646,10.615 20.747,10.615 21.052,10.919 v1(21.052,11.104)
  Bottom Layer w0.25: v1@1.184,8.505 v1(1.35,8.505) ; U2.22 v1@1.503,8.339 ; v1(21.052,11.104) 22.55,11.104 23.033,10.622 25.954,10.622 JP3.1@26.411,11.079
PB22: JP3.4 U2.37 | length 37
  Top Layer w0.25: v1(-0.132,14.203) 1.8,14.203 4.561,16.965 8.89,16.965 9.35,16.505 15.359,16.505 15.819,16.965 19.571,16.965 v1(19.796,17.19)
  Bottom Layer w0.25: v1@-0.132,14.274 U2.37 ; v1(19.796,17.19) 20.212,16.774 23.923,16.774 25.055,15.642 26.262,14.435 26.262,13.393 27.901,11.754 27.901,10.613 27.925,10.589 27.925,9.978 JP3.4
PB23: JP3.3 U2.38 | length 38
  Top Layer w0.25: v1(0.869,13.035) 1.24,13.035 4.719,16.515 8.593,16.515 9.202,15.905 15.73,15.905 16.34,16.515 20.213,16.515 20.696,16.997 v1(20.696,17.429) ; v1(27.554,13.492) 27.808,13.238 27.808,9.682 JP3.3@28.951,8.539
  Bottom Layer w0.25: v1@0.96,13.009 0.934,13.035 v1(0.869,13.035) 1.003,13.169 U2.38 ; v1(20.696,17.429) 23.876,17.429 25.233,16.072 27.554,13.751 v1(27.554,13.492)
REL1: R12.1 U2.29 | length 14.4
  Top Layer w0.25: v1(3.195,8.488) 3.366,8.488 5.226,6.628 5.976,6.628 7.799,4.805 10.079,4.805 v1(10.714,5.44)
  Bottom Layer w0.25: U2.29 1.982,9.499 2.992,8.488 v1(3.195,8.488) ; R12.1 10.282,5.872 v1(10.714,5.44)
REL2: R13.1 U2.30 | length 15.3
  Top Layer w0.25: v1(3.129,9.388) 3.25,9.388 4.39,8.248 4.39,8.072 5.404,7.058 6.154,7.058 6.705,6.507 11.069,6.507 v1@11.933,5.643
  Bottom Layer w0.25: U2.30 2.519,9.999 v1(3.129,9.388) ; R13.1 11.679,5.897 v1(12.136,5.44)
RES1: R21.1 U2.19 | length 27.4
  Top Layer w0.35: v1(3.25,7.605) 4.707,6.148 5.777,6.148 7.6,4.325 14.007,4.325 17.002,7.32 v1(18.766,7.32)
  Bottom Layer w0.25: U2.19 3.018,6.239 3.018,7.373 v1(3.25,7.605)
  Bottom Layer w0.35: v1(18.766,7.32) 24.697,7.32 R21.1
SENS1: R6.2 R16.1 U2.14 | length 13.2
  Bottom Layer w0.25: U2.14 5.503,5.465 5.845,5.124 7.996,5.124 8.397,5.524 8.397,5.53 9.913,7.046 12.929,7.046 13.076,7.193 ; 13.076,7.137 13.096,7.137 ; R6.2 13.096,7.137 ; R16.1@15.87,6.212 15.618,6.212 14.693,7.137 13.096,7.137
SENS2: R7.2 R17.1 U2.13 | length 13.5
  Bottom Layer w0.25: U2.13 6.57,6.224 6.904,6.558 7.855,6.558 9.057,7.76 9.057,7.824 9.27,8.036 9.283,8.036 9.667,8.42 9.667,8.434 9.772,8.539 13.965,8.539 14.473,8.031 R7.2 R7.2@14.517,7.789 ; R7.2@14.589,7.861 15.344,7.105 16.975,7.105 17.267,6.813 R17.1@17.267,6.43
SSR1: R20.1 U2.21 | length 24.6
  Top Layer w0.35: v1@2.051,7.806 4.24,5.618 5.558,5.618 7.38,3.795 14.255,3.795 14.671,4.211 14.699,4.211 17.046,6.558 19.223,6.558 v1(19.274,6.507)
  Bottom Layer w0.25: U2.21 v1@2.003,7.758 ; v1@2.003,7.78 v1@2.003,7.758 ; v1(2.25,8.005) v1@2.003,7.758
  Bottom Layer w0.35: v1(19.274,6.507) 21.192,6.507 R20.1
SWCLK: JP1.4 U2.45 | length 35.6
  Top Layer w0.25: v1(4.364,13.009) 5.484,14.13 20.385,14.13 21.389,15.134 21.389,22.425 v1(22.144,23.18) ; JP1.4 20.672,26.319 21.497,27.144 22.181,27.144 22.195,27.13 22.25,27.13 23.6,25.78 v1(23.6,23.23)
  Bottom Layer w0.25: v1@4.338,13.035 v1(4.364,13.009) 4.503,13.149 U2.45 ; v1(22.144,23.18) 23.55,23.18 v1(23.6,23.23)
SWDIO: JP1.2 U2.46 | length 32.5
  Top Layer w0.25: v1(4.948,12.298) 4.948,12.364 6.284,13.7 20.65,13.7 21.839,14.889 21.839,21.747 22.804,22.712 22.804,25.543 22.029,26.319 JP1.2
  Bottom Layer w0.25: v1@4.897,12.349 v1(4.948,12.298) 5.15,12.5 5.15,13.15 5.003,13.297 U2.46
USB_DM: JP2.2 U2.33 | length 20.7
  Top Layer w0.24: JP2.2 -14.8,1.678 -13.959,2.519 v1(-12.883,2.519)
  Bottom Layer w0.25: v1(-12.883,2.519) -12.883,3.077 -11.943,4.016 -11.943,6.504 -7.774,10.673 -2.874,10.673 -2.048,11.499 U2.33
USB_DP: JP2.3 U2.34 | length 25.1
  Top Layer w0.24: v1@-17.099,2.722 v1(-17.099,2.646) -17.023,2.57 -17.023,2.494 -16.459,1.93 -15.748,1.93 -15.45,1.632 JP2.3
  Bottom Layer w0.24: v1(-17.099,2.646) -17.099,3.459 -16.782,3.777 -12.819,3.777
  Bottom Layer w0.25: -12.819,3.777 -12.373,4.223 -12.373,6.682 -7.932,11.123 -3.06,11.123 -2.184,11.999 U2.34
VC: C7.1 U2.43 | length 2.1
  Bottom Layer w0.25: C7.1 3.031,15.714 3.503,15.242 U2.43
VREF: C16.2 R19.1 U2.4 | length 13.1
  Bottom Layer w0.25: U2.4 8.262,11.499 8.401,11.638 8.463,11.638 8.539,11.714 12.949,11.714 ; C16.2 12.961,11.726 12.949,11.714 ; R19.1 17.267,9.555 16.358,10.464 15.599,10.464 15.215,10.08 15.215,10.068 15.184,10.038 13.94,10.038 13.762,10.215 13.762,11.333 13.381,11.714 12.949,11.714
VUSB: D3.A JP2.1 | length 13.8
  Top Layer w0.35: JP2.1 -14.15,0.885 -13.354,1.681 -12.222,1.681
  Top Layer w0.5: v1(-13.035,4.678) -11.918,4.678 -11.46,4.221 -11.46,2.443 -12.222,1.681
  Bottom Layer w0.5: D3.A -19.055,5.161 -18.572,4.678 v1(-13.035,4.678)
pads on no net: Fid1.0 Fid2.0 JP1.6 JP1.7 JP1.8 JP1.9 JP2.4 U1.7 U1.16 U1.17 U1.21 U1.22 U1.23 U1.24 U1.25 U1.CT U2.10

## Polygon pours and split planes (outlines as drawn)
GND on Top Layer "gnd_top2" (solid, remove dead copper, pour order 3): -20.25,0.205 -11.25,0.205 -11.25,3.122 -11.46,3.332 -11.333,3.205 36.75,3.205 36.75,9.205 9.75,9.205 9.75,18.205 9.25,18.705 6.25,21.705 3.75,21.705 -20.25,21.705

## Keep-outs
Keep-Out Layer:
  the board outline again, w0.1

## Other copper
Top Layer:
  rectangle net D33V: 5.55,24.605 8.15,26.805
  rectangle net D33V: -11.75,10.105 -9.15,11.405
Bottom Layer:
  rectangle net D33V: 5.55,24.605 8.15,26.805
  rectangle net D33V: -11.75,10.105 -9.45,11.605

## Silkscreen, mask and mechanical layers (free items; w line width, h text height)
Top Overlay:
  drawing of 19 lines, arcs and shapes, not listed
  text "SPC1000-FB_V6.1" at 14.7,3.3 h1
Mechanical 2:
  lines w0.1: -28.75,13.605 49.25,13.605 ; -14.45,-1.545 -14.45,6.955 ; 8.25,-3.795 8.25,31.955
  lines w0.15: -20.75,1.605 37.25,1.605 ; -20.75,3.205 37.25,3.205 ; -25.75,-2.395 -25.75,29.605 -8.65,29.605 -8.65,29.355 ccw(c-8.4,29.355) -8.4,29.105 -4.9,29.105 ccw(c-4.9,29.355) -4.65,29.355 -4.65,29.605 21.15,29.605 21.15,29.355 ccw(c21.4,29.355) 21.4,29.105 24.9,29.105 ccw(c24.9,29.355) 25.15,29.355 25.15,29.605 42.25,29.605 42.25,-2.395 25.15,-2.395 25.15,-2.145 ccw(c24.9,-2.145) 24.9,-1.895 21.4,-1.895 ccw(c21.4,-2.145) 21.15,-2.145 21.15,-2.395 -4.65,-2.395 -4.65,-2.145 ccw(c-4.9,-2.145) -4.9,-1.895 -8.4,-1.895 ccw(c-8.4,-2.145) -8.65,-2.145 -8.65,-2.395 -25.75,-2.395 ; -20.75,-0.395 37.25,-0.395 37.25,27.605 -20.75,27.605 -20.75,-0.395
Mechanical 5:
  lines w0.15: -20.5,0.01 37,0.01 37,27.61 -20.5,27.61 -20.5,0.01
  lines w2: -8.75,27.61 3.25,27.61
Mechanical 8:
  the board outline again, w0.1